# Altium PCB layout.PcbDoc (part 5 of 11)
Units mil, origin at the board's own origin, x right, y up, seen from the top; angles counter-clockwise.
Board outline 3543.31 x 3149.61 mil, 2 copper layers (Top Layer, Bottom Layer); 78 components, 73 nets, 327 pads, 143 vias.
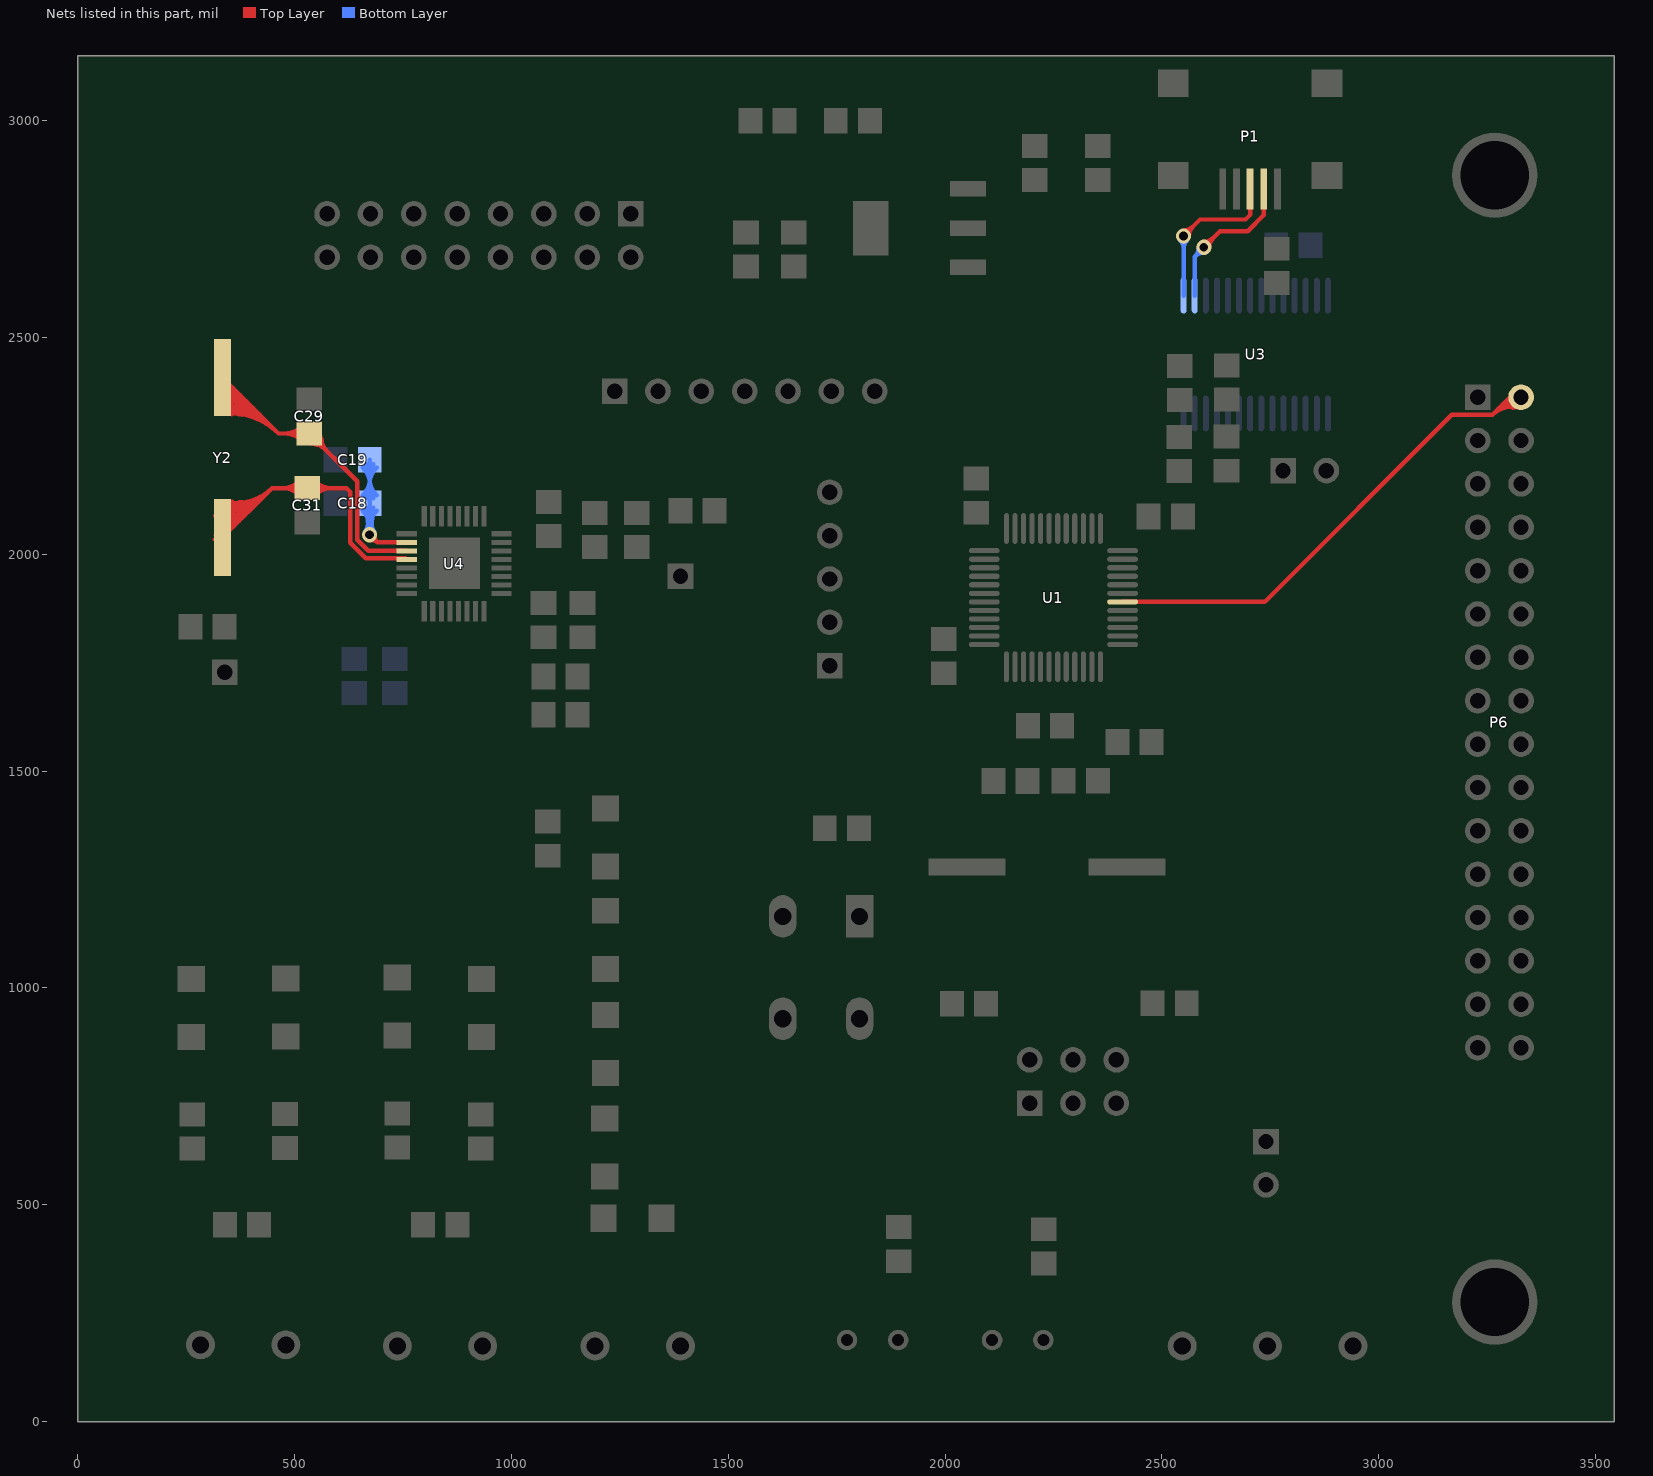
[diagram p5: the nets of this part, all layers, seen from the top]

## Via types
v1: diameter 35, hole 20, Top Layer to Bottom Layer, tented both sides, 113 vias
v2: diameter 35, hole 20, Top Layer to Bottom Layer, 28 vias
v3: diameter 35.43, hole 35.43, Top Layer to Bottom Layer, 2 vias

## Nets (pads, with @x,y where several pads share a name; then routed paths per layer and width w, separated by ;. In a path a pad name is that pad's centre, name@x,y a point inside that pad or via, vN(x,y) a via of type N, cw(c..) or ccw(c..) an arc to the next point about the centre after c; other vN are vias at no path point) (continued)
CLKIN_9153: C31.1 U4.4 Y2.1 | length 10843.8
  Top Layer w10: Y2.1@334,2038.35 448.02,2152.37 ; Y2.1@341.54,2094.65 cw(c347.69,2084.37) 355.99,2093.02 ; Y2.1@348.68,2107.56 ccw(c367.25,2107.95) 354.4,2094.54 ; U4.4@758.72,1988.16 755.95,1990.94 664.13,1990.94 628.5,2026.57 628.5,2143.5 619.63,2152.37 C31.1@529,2152.37 448.02,2152.37 ; Y2.1@316.03,2034.11 ccw(c320.84,2053.66) Y2.1@335.07,2039.43 ; Y2.1@316.03,2034.11 ccw(c320.84,2053.66) Y2.1@335.07,2039.43 ; Y2.1@316.03,2034.11 ccw(c320.84,2053.66) Y2.1@335.07,2039.43 ; Y2.1@316.03,2034.11 ccw(c320.84,2053.66) Y2.1@335.07,2039.43 ; Y2.1@316.03,2034.11 ccw(c320.84,2053.66) Y2.1@335.07,2039.43 ; Y2.1@316.48,2088.98 ccw(c354.79,2128.93) 355.95,2073.59 ; Y2.1@316.48,2088.98 ccw(c331.96,2105.13) Y2.1@332.43,2082.76 ; Y2.1@316.48,2088.98 ccw(c354.79,2128.93) 355.95,2073.59 ; Y2.1@316.48,2088.98 ccw(c331.96,2105.13) Y2.1@332.43,2082.76 ; Y2.1@316.48,2088.98 ccw(c354.79,2128.93) 355.95,2073.59 ; Y2.1@316.48,2088.98 ccw(c331.96,2105.13) Y2.1@332.43,2082.76 ; Y2.1@316.48,2088.98 ccw(c354.79,2128.93) 355.95,2073.59 ; Y2.1@316.48,2088.98 ccw(c331.96,2105.13) Y2.1@332.43,2082.76 ; Y2.1@316.48,2088.98 ccw(c354.79,2128.93) 355.95,2073.59 ; Y2.1@316.48,2088.98 ccw(c331.96,2105.13) Y2.1@332.43,2082.76 ; Y2.1@316.48,2088.98 ccw(c354.79,2128.93) 355.95,2073.59 ; Y2.1@316.48,2088.98 ccw(c331.96,2105.13) Y2.1@332.43,2082.76 ; Y2.1@316.48,2088.98 ccw(c354.79,2128.93) 355.95,2073.59 ; Y2.1@316.48,2088.98 ccw(c331.96,2105.13) Y2.1@332.43,2082.76 ; Y2.1@316.48,2088.98 ccw(c354.79,2128.93) 355.95,2073.59 ; Y2.1@316.48,2088.98 ccw(c331.96,2105.13) Y2.1@332.43,2082.76 ; Y2.1@316.48,2088.98 ccw(c354.79,2128.93) 355.95,2073.59 ; Y2.1@316.48,2088.98 ccw(c331.96,2105.13) Y2.1@332.43,2082.76 ; Y2.1@316.48,2088.98 ccw(c354.79,2128.93) 355.95,2073.59 ; Y2.1@316.48,2088.98 ccw(c331.96,2105.13) Y2.1@332.43,2082.76 ; Y2.1@318.42,2043.82 ccw(c325.79,2073.81) Y2.1@347.62,2051.98 ; Y2.1@318.42,2043.82 ccw(c325.79,2073.81) Y2.1@347.62,2051.98 ; Y2.1@318.42,2043.82 ccw(c325.79,2073.81) Y2.1@347.62,2051.98 ; Y2.1@318.42,2043.82 ccw(c325.79,2073.81) Y2.1@347.62,2051.98 ; Y2.1@318.42,2043.82 ccw(c325.79,2073.81) Y2.1@347.62,2051.98 ; Y2.1@319.77,2101.59 ccw(c360.91,2117.97) Y2.1@350.35,2074.97 ; Y2.1@319.77,2101.59 ccw(c360.91,2117.97) Y2.1@350.35,2074.97 ; Y2.1@319.77,2101.59 ccw(c360.91,2117.97) Y2.1@350.35,2074.97 ; Y2.1@319.77,2101.59 ccw(c360.91,2117.97) Y2.1@350.35,2074.97 ; Y2.1@319.77,2101.59 ccw(c360.91,2117.97) Y2.1@350.35,2074.97 ; Y2.1@319.77,2101.59 ccw(c360.91,2117.97) Y2.1@350.35,2074.97 ; Y2.1@319.77,2101.59 ccw(c360.91,2117.97) Y2.1@350.35,2074.97 ; Y2.1@319.77,2101.59 ccw(c360.91,2117.97) Y2.1@350.35,2074.97 ; Y2.1@319.77,2101.59 ccw(c360.91,2117.97) Y2.1@350.35,2074.97 ; Y2.1@319.77,2101.59 ccw(c360.91,2117.97) Y2.1@350.35,2074.97 ; Y2.1@320.8,2053.53 ccw(c330.73,2093.96) 360.17,2064.52 ; Y2.1@320.8,2053.53 ccw(c330.73,2093.96) 360.17,2064.52 ; Y2.1@320.8,2053.53 ccw(c330.73,2093.96) 360.17,2064.52 ; Y2.1@320.8,2053.53 ccw(c330.73,2093.96) 360.17,2064.52 ; Y2.1@320.8,2053.53 ccw(c330.73,2093.96) 360.17,2064.52 ; Y2.1@323.19,2063.24 ccw(c335.68,2114.11) 372.72,2077.07 ; Y2.1@323.19,2063.24 ccw(c335.68,2114.11) 372.72,2077.07 ; Y2.1@323.19,2063.24 ccw(c335.68,2114.11) 372.72,2077.07 ; Y2.1@323.19,2063.24 ccw(c335.68,2114.11) 372.72,2077.07 ; Y2.1@323.19,2063.24 ccw(c335.68,2114.11) 372.72,2077.07 ; Y2.1@323.4,2096.2 ccw(c355.59,2129.77) 356.57,2083.27 ; Y2.1@323.4,2096.2 ccw(c355.59,2129.77) 356.57,2083.27 ; Y2.1@323.4,2096.2 ccw(c355.59,2129.77) 356.57,2083.27 ; Y2.1@323.4,2096.2 ccw(c355.59,2129.77) 356.57,2083.27 ; Y2.1@323.4,2096.2 ccw(c355.59,2129.77) 356.57,2083.27 ; Y2.1@323.4,2096.2 ccw(c355.59,2129.77) 356.57,2083.27 ; Y2.1@323.4,2096.2 ccw(c355.59,2129.77) 356.57,2083.27 ; Y2.1@323.4,2096.2 ccw(c355.59,2129.77) 356.57,2083.27 ; Y2.1@323.4,2096.2 ccw(c355.59,2129.77) 356.57,2083.27 ; Y2.1@323.4,2096.2 ccw(c355.59,2129.77) 356.57,2083.27 ; Y2.1@325.58,2072.96 ccw(c340.63,2134.26) 385.27,2089.62 ; Y2.1@325.58,2072.96 ccw(c340.63,2134.26) 385.27,2089.62 ; Y2.1@325.58,2072.96 ccw(c340.63,2134.26) 385.27,2089.62 ; Y2.1@325.58,2072.96 ccw(c340.63,2134.26) 385.27,2089.62 ; Y2.1@325.58,2072.96 ccw(c340.63,2134.26) 385.27,2089.62 ; Y2.1@327.96,2082.67 ccw(c345.58,2154.41) 397.82,2102.17 ; Y2.1@327.96,2082.67 ccw(c345.58,2154.41) 397.82,2102.17 ; Y2.1@327.96,2082.67 ccw(c345.58,2154.41) 397.82,2102.17 ; Y2.1@327.96,2082.67 ccw(c345.58,2154.41) 397.82,2102.17 ; Y2.1@327.96,2082.67 ccw(c345.58,2154.41) 397.82,2102.17 ; Y2.1@329.03,2105.38 ccw(c361.14,2117.48) Y2.1@352.95,2084.15 ; Y2.1@329.03,2105.38 ccw(c361.14,2117.48) Y2.1@352.95,2084.15 ; Y2.1@329.03,2105.38 ccw(c361.14,2117.48) Y2.1@352.95,2084.15 ; Y2.1@329.03,2105.38 ccw(c361.14,2117.48) Y2.1@352.95,2084.15 ; Y2.1@329.03,2105.38 ccw(c361.14,2117.48) Y2.1@352.95,2084.15 ; Y2.1@329.03,2105.38 ccw(c361.14,2117.48) Y2.1@352.95,2084.15 ; Y2.1@329.03,2105.38 ccw(c361.14,2117.48) Y2.1@352.95,2084.15 ; Y2.1@329.03,2105.38 ccw(c361.14,2117.48) Y2.1@352.95,2084.15 ; Y2.1@329.03,2105.38 ccw(c361.14,2117.48) Y2.1@352.95,2084.15 ; Y2.1@329.03,2105.38 ccw(c361.14,2117.48) Y2.1@352.95,2084.15 ; Y2.1@330.32,2103.42 ccw(c356.4,2130.61) 357.19,2092.94 ; Y2.1@330.32,2103.42 ccw(c356.4,2130.61) 357.19,2092.94 ; Y2.1@330.32,2103.42 ccw(c356.4,2130.61) 357.19,2092.94 ; Y2.1@330.32,2103.42 ccw(c356.4,2130.61) 357.19,2092.94 ; Y2.1@330.32,2103.42 ccw(c356.4,2130.61) 357.19,2092.94 ; Y2.1@330.32,2103.42 ccw(c356.4,2130.61) 357.19,2092.94 ; Y2.1@330.32,2103.42 ccw(c356.4,2130.61) 357.19,2092.94 ; Y2.1@330.32,2103.42 ccw(c356.4,2130.61) 357.19,2092.94 ; Y2.1@330.32,2103.42 ccw(c356.4,2130.61) 357.19,2092.94 ; Y2.1@330.32,2103.42 ccw(c356.4,2130.61) 357.19,2092.94 ; Y2.1@330.35,2092.38 ccw(c350.53,2174.55) 410.37,2114.72 ; Y2.1@330.35,2092.38 ccw(c350.53,2174.55) 410.37,2114.72 ; Y2.1@330.35,2092.38 ccw(c350.53,2174.55) 410.37,2114.72 ; Y2.1@330.35,2092.38 ccw(c350.53,2174.55) 410.37,2114.72 ; Y2.1@330.35,2092.38 ccw(c350.53,2174.55) 410.37,2114.72 ; Y2.1@330.4,2111.16 cw(c355,2084.46) 356.49,2120.74 ; Y2.1@330.4,2111.16 cw(c355,2084.46) 356.49,2120.74 ; Y2.1@330.4,2111.16 cw(c355,2084.46) 356.49,2120.74 ; Y2.1@330.4,2111.16 cw(c355,2084.46) 356.49,2120.74 ; Y2.1@330.4,2111.16 cw(c355,2084.46) 356.49,2120.74 ; Y2.1@330.4,2111.16 cw(c355,2084.46) 356.49,2120.74 ; Y2.1@330.4,2111.16 cw(c355,2084.46) 356.49,2120.74 ; Y2.1@330.4,2111.16 cw(c355,2084.46) 356.49,2120.74 ; Y2.1@330.4,2111.16 cw(c355,2084.46) 356.49,2120.74 ; Y2.1@330.4,2111.16 cw(c355,2084.46) 356.49,2120.74 ; Y2.1@332.73,2102.09 ccw(c355.48,2194.7) 422.91,2127.27 ; Y2.1@332.73,2102.09 ccw(c355.48,2194.7) 422.91,2127.27 ; Y2.1@332.73,2102.09 ccw(c355.48,2194.7) 422.91,2127.27 ; Y2.1@332.73,2102.09 ccw(c355.48,2194.7) 422.91,2127.27 ; Y2.1@332.73,2102.09 ccw(c355.48,2194.7) 422.91,2127.27 ; Y2.1@335.12,2111.8 ccw(c360.43,2214.85) 435.46,2139.82 ; Y2.1@335.12,2111.8 ccw(c360.43,2214.85) 435.46,2139.82 ; Y2.1@335.12,2111.8 ccw(c360.43,2214.85) 435.46,2139.82 ; Y2.1@335.12,2111.8 ccw(c360.43,2214.85) 435.46,2139.82 ; Y2.1@335.12,2111.8 ccw(c360.43,2214.85) 435.46,2139.82 ; Y2.1@337.17,2103.81 cw(c378.13,2059.35) 380.61,2119.75 ; Y2.1@337.17,2103.81 cw(c378.13,2059.35) 380.61,2119.75 ; Y2.1@337.17,2103.81 cw(c378.13,2059.35) 380.61,2119.75 ; Y2.1@337.17,2103.81 cw(c378.13,2059.35) 380.61,2119.75 ; Y2.1@337.17,2103.81 cw(c378.13,2059.35) 380.61,2119.75 ; Y2.1@337.17,2103.81 cw(c378.13,2059.35) 380.61,2119.75 ; Y2.1@337.17,2103.81 cw(c378.13,2059.35) 380.61,2119.75 ; Y2.1@337.17,2103.81 cw(c378.13,2059.35) 380.61,2119.75 ; Y2.1@337.17,2103.81 cw(c378.13,2059.35) 380.61,2119.75 ; Y2.1@337.17,2103.81 cw(c378.13,2059.35) 380.61,2119.75 ; Y2.1@337.24,2110.63 ccw(c357.2,2131.45) 357.81,2102.62 ; Y2.1@337.24,2110.63 ccw(c357.2,2131.45) 357.81,2102.62 ; Y2.1@337.24,2110.63 ccw(c357.2,2131.45) 357.81,2102.62 ; Y2.1@337.24,2110.63 ccw(c357.2,2131.45) 357.81,2102.62 ; Y2.1@337.24,2110.63 ccw(c357.2,2131.45) 357.81,2102.62 ; Y2.1@337.24,2110.63 ccw(c357.2,2131.45) 357.81,2102.62 ; Y2.1@337.24,2110.63 ccw(c357.2,2131.45) 357.81,2102.62 ; Y2.1@337.24,2110.63 ccw(c357.2,2131.45) 357.81,2102.62 ; Y2.1@337.24,2110.63 ccw(c357.2,2131.45) 357.81,2102.62 ; Y2.1@337.24,2110.63 ccw(c357.2,2131.45) 357.81,2102.62 ; Y2.1@337.28,2103.91 cw(c356.12,2084.73) 356.36,2111.61 ; Y2.1@337.28,2103.91 cw(c356.12,2084.73) 356.36,2111.61 ; Y2.1@337.28,2103.91 cw(c356.12,2084.73) 356.36,2111.61 ; Y2.1@337.28,2103.91 cw(c356.12,2084.73) 356.36,2111.61 ; Y2.1@337.28,2103.91 cw(c356.12,2084.73) 356.36,2111.61 ; Y2.1@337.28,2103.91 cw(c356.12,2084.73) 356.36,2111.61 ; Y2.1@337.28,2103.91 cw(c356.12,2084.73) 356.36,2111.61 ; Y2.1@337.28,2103.91 cw(c356.12,2084.73) 356.36,2111.61 ; Y2.1@337.28,2103.91 cw(c356.12,2084.73) 356.36,2111.61 ; Y2.1@337.28,2103.91 cw(c356.12,2084.73) 356.36,2111.61 ; Y2.1@337.5,2121.51 ccw(c365.38,2235) 448.01,2152.37 ; Y2.1@337.5,2121.51 ccw(c365.38,2235) 448.01,2152.37 ; Y2.1@337.5,2121.51 ccw(c365.38,2235) 448.01,2152.37 ; Y2.1@337.5,2121.51 ccw(c365.38,2235) 448.01,2152.37 ; Y2.1@337.5,2121.51 ccw(c365.38,2235) 448.01,2152.37 ; Y2.1@338.44,2108.75 ccw(c360.65,2116.22) 355.06,2093.46 ; Y2.1@338.44,2108.75 ccw(c360.65,2116.22) 355.06,2093.46 ; Y2.1@338.44,2108.75 ccw(c360.65,2116.22) 355.06,2093.46 ; Y2.1@338.44,2108.75 ccw(c360.65,2116.22) 355.06,2093.46 ; Y2.1@338.44,2108.75 ccw(c360.65,2116.22) 355.06,2093.46 ; Y2.1@338.44,2108.75 ccw(c360.65,2116.22) 355.06,2093.46 ; Y2.1@338.44,2108.75 ccw(c360.65,2116.22) 355.06,2093.46 ; Y2.1@338.44,2108.75 ccw(c360.65,2116.22) 355.06,2093.46 ; Y2.1@338.44,2108.75 ccw(c360.65,2116.22) 355.06,2093.46 ; Y2.1@338.44,2108.75 ccw(c360.65,2116.22) 355.06,2093.46 ; Y2.1@339.71,2093.72 cw(c347.04,2076.33) 356.14,2092.87 ; Y2.1@339.71,2093.72 cw(c347.04,2076.33) 356.14,2092.87 ; Y2.1@339.71,2093.72 cw(c347.04,2076.33) 356.14,2092.87 ; Y2.1@339.71,2093.72 cw(c347.04,2076.33) 356.14,2092.87 ; Y2.1@339.71,2093.72 cw(c347.04,2076.33) 356.14,2092.87 ; Y2.1@343.19,2118.71 ccw(c354.05,2132.26) 362.12,2116.88 ; Y2.1@343.19,2118.71 ccw(c354.05,2132.26) 362.12,2116.88 ; Y2.1@343.19,2118.71 ccw(c354.05,2132.26) 362.12,2116.88 ; Y2.1@343.19,2118.71 ccw(c354.05,2132.26) 362.12,2116.88 ; Y2.1@343.19,2118.71 ccw(c354.05,2132.26) 362.12,2116.88 ; Y2.1@343.19,2118.71 ccw(c354.05,2132.26) 362.12,2116.88 ; Y2.1@343.19,2118.71 ccw(c354.05,2132.26) 362.12,2116.88 ; Y2.1@343.19,2118.71 ccw(c354.05,2132.26) 362.12,2116.88 ; Y2.1@343.19,2118.71 ccw(c354.05,2132.26) 362.12,2116.88 ; Y2.1@343.19,2118.71 ccw(c354.05,2132.26) 362.12,2116.88 ; Y2.1@344.16,2117.85 ccw(c380.84,2156.09) 381.94,2103.12 ; Y2.1@344.16,2117.85 ccw(c380.84,2156.09) 381.94,2103.12 ; Y2.1@344.16,2117.85 ccw(c380.84,2156.09) 381.94,2103.12 ; Y2.1@344.16,2117.85 ccw(c380.84,2156.09) 381.94,2103.12 ; Y2.1@344.16,2117.85 ccw(c380.84,2156.09) 381.94,2103.12 ; Y2.1@344.16,2117.85 ccw(c380.84,2156.09) 381.94,2103.12 ; Y2.1@344.16,2117.85 ccw(c380.84,2156.09) 381.94,2103.12 ; Y2.1@344.16,2117.85 ccw(c380.84,2156.09) 381.94,2103.12 ; Y2.1@344.16,2117.85 ccw(c380.84,2156.09) 381.94,2103.12 ; Y2.1@344.16,2117.85 ccw(c380.84,2156.09) 381.94,2103.12 ; Y2.1@344.29,2096.78 cw(c380.04,2060.38) 380.5,2111.4 ; Y2.1@344.29,2096.78 cw(c380.04,2060.38) 380.5,2111.4 ; Y2.1@344.29,2096.78 cw(c380.04,2060.38) 380.5,2111.4 ; Y2.1@344.29,2096.78 cw(c380.04,2060.38) 380.5,2111.4 ; Y2.1@344.29,2096.78 cw(c380.04,2060.38) 380.5,2111.4 ; Y2.1@344.29,2096.78 cw(c380.04,2060.38) 380.5,2111.4 ; Y2.1@344.29,2096.78 cw(c380.04,2060.38) 380.5,2111.4 ; Y2.1@344.29,2096.78 cw(c380.04,2060.38) 380.5,2111.4 ; Y2.1@344.29,2096.78 cw(c380.04,2060.38) 380.5,2111.4 ; Y2.1@344.29,2096.78 cw(c380.04,2060.38) 380.5,2111.4 ; Y2.1@344.48,2117.54 ccw(c358.66,2131.48) 358.48,2111.59 ; Y2.1@344.48,2117.54 ccw(c358.66,2131.48) 358.48,2111.59 ; Y2.1@344.48,2117.54 ccw(c358.66,2131.48) 358.48,2111.59 ; Y2.1@344.48,2117.54 ccw(c358.66,2131.48) 358.48,2111.59 ; Y2.1@344.48,2117.54 ccw(c358.66,2131.48) 358.48,2111.59 ; Y2.1@344.48,2117.54 ccw(c358.66,2131.48) 358.48,2111.59 ; Y2.1@344.48,2117.54 ccw(c358.66,2131.48) 358.48,2111.59 ; Y2.1@344.48,2117.54 ccw(c358.66,2131.48) 358.48,2111.59 ; Y2.1@344.48,2117.54 ccw(c358.66,2131.48) 358.48,2111.59 ; Y2.1@344.48,2117.54 ccw(c358.66,2131.48) 358.48,2111.59 ; Y2.1@344.6,2097.09 cw(c357.54,2084.68) 357.16,2102.6 ; Y2.1@344.6,2097.09 cw(c357.54,2084.68) 357.16,2102.6 ; Y2.1@344.6,2097.09 cw(c357.54,2084.68) 357.16,2102.6 ; Y2.1@344.6,2097.09 cw(c357.54,2084.68) 357.16,2102.6 ; Y2.1@344.6,2097.09 cw(c357.54,2084.68) 357.16,2102.6 ; Y2.1@344.6,2097.09 cw(c357.54,2084.68) 357.16,2102.6 ; Y2.1@344.6,2097.09 cw(c357.54,2084.68) 357.16,2102.6 ; Y2.1@344.6,2097.09 cw(c357.54,2084.68) 357.16,2102.6 ; Y2.1@344.6,2097.09 cw(c357.54,2084.68) 357.16,2102.6 ; Y2.1@344.6,2097.09 cw(c357.54,2084.68) 357.16,2102.6 ; Y2.1@346.43,2099.44 cw(c353.6,2094.93) 355.62,2103.15 ; Y2.1@346.43,2099.44 cw(c353.6,2094.93) 355.62,2103.15 ; Y2.1@346.43,2099.44 cw(c353.6,2094.93) 355.62,2103.15 ; Y2.1@346.43,2099.44 cw(c353.6,2094.93) 355.62,2103.15 ; Y2.1@346.43,2099.44 cw(c353.6,2094.93) 355.62,2103.15 ; Y2.1@346.43,2099.44 cw(c353.6,2094.93) 355.62,2103.15 ; Y2.1@346.43,2099.44 cw(c353.6,2094.93) 355.62,2103.15 ; Y2.1@346.43,2099.44 cw(c353.6,2094.93) 355.62,2103.15 ; Y2.1@346.43,2099.44 cw(c353.6,2094.93) 355.62,2103.15 ; Y2.1@346.43,2099.44 cw(c353.6,2094.93) 355.62,2103.15 ; Y2.1@348.02,2102.87 cw(c367.11,2096.91) 357.83,2114.63 ; Y2.1@348.02,2102.87 cw(c367.11,2096.91) 357.83,2114.63 ; Y2.1@348.02,2102.87 cw(c367.11,2096.91) 357.83,2114.63 ; Y2.1@348.02,2102.87 cw(c367.11,2096.91) 357.83,2114.63 ; Y2.1@348.02,2102.87 cw(c367.11,2096.91) 357.83,2114.63 ; Y2.1@348.02,2102.87 cw(c367.11,2096.91) 357.83,2114.63 ; Y2.1@348.02,2102.87 cw(c367.11,2096.91) 357.83,2114.63 ; Y2.1@348.02,2102.87 cw(c367.11,2096.91) 357.83,2114.63 ; Y2.1@348.02,2102.87 cw(c367.11,2096.91) 357.83,2114.63 ; Y2.1@348.02,2102.87 cw(c367.11,2096.91) 357.83,2114.63 ; Y2.1@348.31,2110.56 ccw(c357.99,2112.81) 355.62,2103.15 ; Y2.1@348.31,2110.56 ccw(c357.99,2112.81) 355.62,2103.15 ; Y2.1@348.31,2110.56 ccw(c357.99,2112.81) 355.62,2103.15 ; Y2.1@348.31,2110.56 ccw(c357.99,2112.81) 355.62,2103.15 ; Y2.1@348.31,2110.56 ccw(c357.99,2112.81) 355.62,2103.15 ; Y2.1@348.31,2110.56 ccw(c357.99,2112.81) 355.62,2103.15 ; Y2.1@348.31,2110.56 ccw(c357.99,2112.81) 355.62,2103.15 ; Y2.1@348.31,2110.56 ccw(c357.99,2112.81) 355.62,2103.15 ; Y2.1@348.31,2110.56 ccw(c357.99,2112.81) 355.62,2103.15 ; Y2.1@348.31,2110.56 ccw(c357.99,2112.81) 355.62,2103.15 ; Y2.1@348.66,2106.4 ccw(c363.11,2105.56) 356.14,2092.87 ; Y2.1@348.66,2106.4 ccw(c363.11,2105.56) 356.14,2092.87 ; Y2.1@348.66,2106.4 ccw(c363.11,2105.56) 356.14,2092.87 ; Y2.1@348.66,2106.4 ccw(c363.11,2105.56) 356.14,2092.87 ; Y2.1@348.66,2106.4 ccw(c363.11,2105.56) 356.14,2092.87 ; 472.57,2152.37 cw(c472.57,2097.91) C31.1@511.08,2136.42 ; 472.57,2152.37 ccw(c472.57,2206.83) C31.1@511.08,2168.32 ; 472.57,2152.37 cw(c472.57,2097.91) C31.1@511.08,2136.42 ; 472.57,2152.37 ccw(c472.57,2206.83) C31.1@511.08,2168.32 ; 472.57,2152.37 cw(c472.57,2097.91) C31.1@511.08,2136.42 ; 472.57,2152.37 ccw(c472.57,2206.83) C31.1@511.08,2168.32 ; 472.57,2152.37 cw(c472.57,2097.91) C31.1@511.08,2136.42 ; 472.57,2152.37 ccw(c472.57,2206.83) C31.1@511.08,2168.32 ; 472.57,2152.37 cw(c472.57,2097.91) C31.1@511.08,2136.42 ; 472.57,2152.37 ccw(c472.57,2206.83) C31.1@511.08,2168.32 ; 496.71,2152.37 cw(c496.71,2122.05) C31.1@518.15,2143.49 ; 496.71,2152.37 ccw(c496.71,2182.69) C31.1@518.15,2161.25 ; 496.71,2152.37 cw(c496.71,2122.05) C31.1@518.15,2143.49 ; 496.71,2152.37 ccw(c496.71,2182.69) C31.1@518.15,2161.25 ; 496.71,2152.37 cw(c496.71,2122.05) C31.1@518.15,2143.49 ; 496.71,2152.37 ccw(c496.71,2182.69) C31.1@518.15,2161.25 ; 496.71,2152.37 cw(c496.71,2122.05) C31.1@518.15,2143.49 ; 496.71,2152.37 ccw(c496.71,2182.69) C31.1@518.15,2161.25 ; 496.71,2152.37 cw(c496.71,2122.05) C31.1@518.15,2143.49 ; 496.71,2152.37 ccw(c496.71,2182.69) C31.1@518.15,2161.25 ; C31.1@539.85,2143.49 cw(c561.29,2122.05) 561.29,2152.37 ; C31.1@539.85,2143.49 cw(c561.29,2122.05) 561.29,2152.37 ; C31.1@539.85,2143.49 cw(c561.29,2122.05) 561.29,2152.37 ; C31.1@539.85,2143.49 cw(c561.29,2122.05) 561.29,2152.37 ; C31.1@539.85,2143.49 cw(c561.29,2122.05) 561.29,2152.37 ; C31.1@539.85,2161.25 ccw(c561.29,2182.69) 561.29,2152.37 ; C31.1@539.85,2161.25 ccw(c561.29,2182.69) 561.29,2152.37 ; C31.1@539.85,2161.25 ccw(c561.29,2182.69) 561.29,2152.37 ; C31.1@539.85,2161.25 ccw(c561.29,2182.69) 561.29,2152.37 ; C31.1@539.85,2161.25 ccw(c561.29,2182.69) 561.29,2152.37 ; C31.1@546.92,2136.42 cw(c585.43,2097.91) 585.43,2152.37 ; C31.1@546.92,2136.42 cw(c585.43,2097.91) 585.43,2152.37 ; C31.1@546.92,2136.42 cw(c585.43,2097.91) 585.43,2152.37 ; C31.1@546.92,2136.42 cw(c585.43,2097.91) 585.43,2152.37 ; C31.1@546.92,2136.42 cw(c585.43,2097.91) 585.43,2152.37 ; C31.1@546.92,2168.32 ccw(c585.43,2206.83) 585.43,2152.37 ; C31.1@546.92,2168.32 ccw(c585.43,2206.83) 585.43,2152.37 ; C31.1@546.92,2168.32 ccw(c585.43,2206.83) 585.43,2152.37 ; C31.1@546.92,2168.32 ccw(c585.43,2206.83) 585.43,2152.37 ; C31.1@546.92,2168.32 ccw(c585.43,2206.83) 585.43,2152.37 ; 732.11,1990.94 cw(c732.11,1979.26) U4.4@740.37,1987.52 ; 732.11,1990.94 cw(c732.11,1979.26) U4.4@740.37,1987.52 ; 732.11,1990.94 cw(c732.11,1979.26) U4.4@740.37,1987.52 ; 732.11,1990.94 cw(c732.11,1979.26) U4.4@740.37,1987.52 ; 732.11,1990.94 cw(c732.11,1979.26) U4.4@740.37,1987.52
CLKOUT_9153: C29.1 U4.3 Y2.2 | length 10493.8
  Top Layer w10: Y2.2@334,2407.65 463.02,2278.63 ; U4.3@758.72,2007.84 669.85,2007.84 644.5,2033.2 644.5,2168.13 C29.1@534,2278.63 463.02,2278.63 ; Y2.2@321.05,2346.92 cw(c360.08,2322.3) 367.51,2367.84 ; Y2.2@321.05,2346.92 cw(c360.08,2322.3) 367.51,2367.84 ; Y2.2@321.05,2346.92 cw(c360.08,2322.3) 367.51,2367.84 ; Y2.2@321.05,2346.92 cw(c360.08,2322.3) 367.51,2367.84 ; Y2.2@321.05,2346.92 cw(c360.08,2322.3) 367.51,2367.84 ; Y2.2@321.05,2346.92 cw(c360.08,2322.3) 367.51,2367.84 ; Y2.2@321.05,2346.92 cw(c360.08,2322.3) 367.51,2367.84 ; Y2.2@321.05,2346.92 cw(c360.08,2322.3) 367.51,2367.84 ; Y2.2@321.05,2346.92 cw(c360.08,2322.3) 367.51,2367.84 ; Y2.2@321.05,2346.92 cw(c360.08,2322.3) 367.51,2367.84 ; Y2.2@321.57,2398.7 ccw(c358.7,2425.42) Y2.2@351.33,2380.27 ; Y2.2@321.57,2398.7 ccw(c358.7,2425.42) Y2.2@351.33,2380.27 ; Y2.2@321.57,2398.7 ccw(c358.7,2425.42) Y2.2@351.33,2380.27 ; Y2.2@321.57,2398.7 ccw(c358.7,2425.42) Y2.2@351.33,2380.27 ; Y2.2@321.57,2398.7 ccw(c358.7,2425.42) Y2.2@351.33,2380.27 ; Y2.2@321.57,2398.7 ccw(c358.7,2425.42) Y2.2@351.33,2380.27 ; Y2.2@321.57,2398.7 ccw(c358.7,2425.42) Y2.2@351.33,2380.27 ; Y2.2@321.57,2398.7 ccw(c358.7,2425.42) Y2.2@351.33,2380.27 ; Y2.2@321.57,2398.7 ccw(c358.7,2425.42) Y2.2@351.33,2380.27 ; Y2.2@321.57,2398.7 ccw(c358.7,2425.42) Y2.2@351.33,2380.27 ; Y2.2@322.14,2348.44 cw(c361.19,2316.52) 356.15,2366.7 ; Y2.2@322.14,2348.44 cw(c361.19,2316.52) 356.15,2366.7 ; Y2.2@322.14,2348.44 cw(c361.19,2316.52) 356.15,2366.7 ; Y2.2@322.14,2348.44 cw(c361.19,2316.52) 356.15,2366.7 ; Y2.2@322.14,2348.44 cw(c361.19,2316.52) 356.15,2366.7 ; Y2.2@322.14,2348.44 cw(c361.19,2316.52) 356.15,2366.7 ; Y2.2@322.14,2348.44 cw(c361.19,2316.52) 356.15,2366.7 ; Y2.2@322.14,2348.44 cw(c361.19,2316.52) 356.15,2366.7 ; Y2.2@322.14,2348.44 cw(c361.19,2316.52) 356.15,2366.7 ; Y2.2@322.14,2348.44 cw(c361.19,2316.52) 356.15,2366.7 ; Y2.2@327.48,2403.74 cw(c329.48,2383.74) Y2.2@343.7,2397.95 ; Y2.2@327.48,2403.74 cw(c329.48,2383.74) Y2.2@343.7,2397.95 ; Y2.2@327.48,2403.74 cw(c329.48,2383.74) Y2.2@343.7,2397.95 ; Y2.2@327.48,2403.74 cw(c329.48,2383.74) Y2.2@343.7,2397.95 ; Y2.2@327.48,2403.74 cw(c329.48,2383.74) Y2.2@343.7,2397.95 ; Y2.2@328.48,2393.79 cw(c332.2,2356.63) 358.61,2383.04 ; Y2.2@328.48,2393.79 cw(c332.2,2356.63) 358.61,2383.04 ; Y2.2@328.48,2393.79 cw(c332.2,2356.63) 358.61,2383.04 ; Y2.2@328.48,2393.79 cw(c332.2,2356.63) 358.61,2383.04 ; Y2.2@328.48,2393.79 cw(c332.2,2356.63) 358.61,2383.04 ; Y2.2@328.7,2339.1 cw(c356.17,2337.27) Y2.2@346.42,2363.02 ; Y2.2@328.7,2339.1 cw(c356.17,2337.27) Y2.2@346.42,2363.02 ; Y2.2@328.7,2339.1 cw(c356.17,2337.27) Y2.2@346.42,2363.02 ; Y2.2@328.7,2339.1 cw(c356.17,2337.27) Y2.2@346.42,2363.02 ; Y2.2@328.7,2339.1 cw(c356.17,2337.27) Y2.2@346.42,2363.02 ; Y2.2@329.47,2383.84 cw(c334.93,2329.52) 373.52,2368.12 ; Y2.2@329.47,2383.84 cw(c334.93,2329.52) 373.52,2368.12 ; Y2.2@329.47,2383.84 cw(c334.93,2329.52) 373.52,2368.12 ; Y2.2@329.47,2383.84 cw(c334.93,2329.52) 373.52,2368.12 ; Y2.2@329.47,2383.84 cw(c334.93,2329.52) 373.52,2368.12 ; Y2.2@330.05,2335.19 ccw(c357.35,2359.74) 355.4,2323.08 ; Y2.2@330.05,2335.19 ccw(c357.35,2359.74) 355.4,2323.08 ; Y2.2@330.05,2335.19 ccw(c357.35,2359.74) 355.4,2323.08 ; Y2.2@330.05,2335.19 ccw(c357.35,2359.74) 355.4,2323.08 ; Y2.2@330.05,2335.19 ccw(c357.35,2359.74) 355.4,2323.08 ; Y2.2@330.05,2335.19 ccw(c357.35,2359.74) 355.4,2323.08 ; Y2.2@330.05,2335.19 ccw(c357.35,2359.74) 355.4,2323.08 ; Y2.2@330.05,2335.19 ccw(c357.35,2359.74) 355.4,2323.08 ; Y2.2@330.05,2335.19 ccw(c357.35,2359.74) 355.4,2323.08 ; Y2.2@330.05,2335.19 ccw(c357.35,2359.74) 355.4,2323.08 ; Y2.2@330.47,2373.89 cw(c337.65,2302.42) 388.44,2353.21 ; Y2.2@330.47,2373.89 cw(c337.65,2302.42) 388.44,2353.21 ; Y2.2@330.47,2373.89 cw(c337.65,2302.42) 388.44,2353.21 ; Y2.2@330.47,2373.89 cw(c337.65,2302.42) 388.44,2353.21 ; Y2.2@330.47,2373.89 cw(c337.65,2302.42) 388.44,2353.21 ; Y2.2@331.47,2363.94 cw(c340.37,2275.31) 403.35,2338.29 ; Y2.2@331.47,2363.94 cw(c340.37,2275.31) 403.35,2338.29 ; Y2.2@331.47,2363.94 cw(c340.37,2275.31) 403.35,2338.29 ; Y2.2@331.47,2363.94 cw(c340.37,2275.31) 403.35,2338.29 ; Y2.2@331.47,2363.94 cw(c340.37,2275.31) 403.35,2338.29 ; Y2.2@332.47,2353.99 cw(c343.09,2248.2) 418.27,2323.38 ; Y2.2@332.47,2353.99 cw(c343.09,2248.2) 418.27,2323.38 ; Y2.2@332.47,2353.99 cw(c343.09,2248.2) 418.27,2323.38 ; Y2.2@332.47,2353.99 cw(c343.09,2248.2) 418.27,2323.38 ; Y2.2@332.47,2353.99 cw(c343.09,2248.2) 418.27,2323.38 ; Y2.2@333.47,2344.04 cw(c345.81,2221.09) 433.18,2308.46 ; Y2.2@333.47,2344.04 cw(c345.81,2221.09) 433.18,2308.46 ; Y2.2@333.47,2344.04 cw(c345.81,2221.09) 433.18,2308.46 ; Y2.2@333.47,2344.04 cw(c345.81,2221.09) 433.18,2308.46 ; Y2.2@333.47,2344.04 cw(c345.81,2221.09) 433.18,2308.46 ; Y2.2@334.47,2334.09 cw(c348.53,2193.98) 448.1,2293.55 ; Y2.2@334.47,2334.09 cw(c348.53,2193.98) 448.1,2293.55 ; Y2.2@334.47,2334.09 cw(c348.53,2193.98) 448.1,2293.55 ; Y2.2@334.47,2334.09 cw(c348.53,2193.98) 448.1,2293.55 ; Y2.2@334.47,2334.09 cw(c348.53,2193.98) 448.1,2293.55 ; Y2.2@335.47,2324.14 cw(c351.25,2166.88) 463.01,2278.63 ; Y2.2@335.47,2324.14 cw(c351.25,2166.88) 463.01,2278.63 ; Y2.2@335.47,2324.14 cw(c351.25,2166.88) 463.01,2278.63 ; Y2.2@335.47,2324.14 cw(c351.25,2166.88) 463.01,2278.63 ; Y2.2@335.47,2324.14 cw(c351.25,2166.88) 463.01,2278.63 ; Y2.2@337.48,2341.88 ccw(c382.74,2382.57) 379.51,2321.79 ; Y2.2@337.48,2341.88 ccw(c382.74,2382.57) 379.51,2321.79 ; Y2.2@337.48,2341.88 ccw(c382.74,2382.57) 379.51,2321.79 ; Y2.2@337.48,2341.88 ccw(c382.74,2382.57) 379.51,2321.79 ; Y2.2@337.48,2341.88 ccw(c382.74,2382.57) 379.51,2321.79 ; Y2.2@337.48,2341.88 ccw(c382.74,2382.57) 379.51,2321.79 ; Y2.2@337.48,2341.88 ccw(c382.74,2382.57) 379.51,2321.79 ; Y2.2@337.48,2341.88 ccw(c382.74,2382.57) 379.51,2321.79 ; Y2.2@337.48,2341.88 ccw(c382.74,2382.57) 379.51,2321.79 ; Y2.2@337.48,2341.88 ccw(c382.74,2382.57) 379.51,2321.79 ; Y2.2@337.55,2341.8 ccw(c358.08,2359.43) 356.03,2332.45 ; Y2.2@337.55,2341.8 ccw(c358.08,2359.43) 356.03,2332.45 ; Y2.2@337.55,2341.8 ccw(c358.08,2359.43) 356.03,2332.45 ; Y2.2@337.55,2341.8 ccw(c358.08,2359.43) 356.03,2332.45 ; Y2.2@337.55,2341.8 ccw(c358.08,2359.43) 356.03,2332.45 ; Y2.2@337.55,2341.8 ccw(c358.08,2359.43) 356.03,2332.45 ; Y2.2@337.55,2341.8 ccw(c358.08,2359.43) 356.03,2332.45 ; Y2.2@337.55,2341.8 ccw(c358.08,2359.43) 356.03,2332.45 ; Y2.2@337.55,2341.8 ccw(c358.08,2359.43) 356.03,2332.45 ; Y2.2@337.55,2341.8 ccw(c358.08,2359.43) 356.03,2332.45 ; Y2.2@341.57,2326.16 cw(c351.59,2309.48) 362.21,2325.8 ; Y2.2@341.57,2326.16 cw(c351.59,2309.48) 362.21,2325.8 ; Y2.2@341.57,2326.16 cw(c351.59,2309.48) 362.21,2325.8 ; Y2.2@341.57,2326.16 cw(c351.59,2309.48) 362.21,2325.8 ; Y2.2@341.57,2326.16 cw(c351.59,2309.48) 362.21,2325.8 ; Y2.2@341.57,2326.16 cw(c351.59,2309.48) 362.21,2325.8 ; Y2.2@341.57,2326.16 cw(c351.59,2309.48) 362.21,2325.8 ; Y2.2@341.57,2326.16 cw(c351.59,2309.48) 362.21,2325.8 ; Y2.2@341.57,2326.16 cw(c351.59,2309.48) 362.21,2325.8 ; Y2.2@341.57,2326.16 cw(c351.59,2309.48) 362.21,2325.8 ; Y2.2@343.57,2327.61 cw(c356.41,2312.66) 357.9,2332.31 ; Y2.2@343.57,2327.61 cw(c356.41,2312.66) 357.9,2332.31 ; Y2.2@343.57,2327.61 cw(c356.41,2312.66) 357.9,2332.31 ; Y2.2@343.57,2327.61 cw(c356.41,2312.66) 357.9,2332.31 ; Y2.2@343.57,2327.61 cw(c356.41,2312.66) 357.9,2332.31 ; Y2.2@343.57,2327.61 cw(c356.41,2312.66) 357.9,2332.31 ; Y2.2@343.57,2327.61 cw(c356.41,2312.66) 357.9,2332.31 ; Y2.2@343.57,2327.61 cw(c356.41,2312.66) 357.9,2332.31 ; Y2.2@343.57,2327.61 cw(c356.41,2312.66) 357.9,2332.31 ; Y2.2@343.57,2327.61 cw(c356.41,2312.66) 357.9,2332.31 ; Y2.2@345.14,2348.32 ccw(c383.98,2381.68) 380.11,2330.63 ; Y2.2@345.14,2348.32 ccw(c383.98,2381.68) 380.11,2330.63 ; Y2.2@345.14,2348.32 ccw(c383.98,2381.68) 380.11,2330.63 ; Y2.2@345.14,2348.32 ccw(c383.98,2381.68) 380.11,2330.63 ; Y2.2@345.14,2348.32 ccw(c383.98,2381.68) 380.11,2330.63 ; Y2.2@345.14,2348.32 ccw(c383.98,2381.68) 380.11,2330.63 ; Y2.2@345.14,2348.32 ccw(c383.98,2381.68) 380.11,2330.63 ; Y2.2@345.14,2348.32 ccw(c383.98,2381.68) 380.11,2330.63 ; Y2.2@345.14,2348.32 ccw(c383.98,2381.68) 380.11,2330.63 ; Y2.2@345.14,2348.32 ccw(c383.98,2381.68) 380.11,2330.63 ; Y2.2@345.41,2347.99 ccw(c359.15,2359.12) 357.31,2341.53 ; Y2.2@345.41,2347.99 ccw(c359.15,2359.12) 357.31,2341.53 ; Y2.2@345.41,2347.99 ccw(c359.15,2359.12) 357.31,2341.53 ; Y2.2@345.41,2347.99 ccw(c359.15,2359.12) 357.31,2341.53 ; Y2.2@345.41,2347.99 ccw(c359.15,2359.12) 357.31,2341.53 ; Y2.2@345.41,2347.99 ccw(c359.15,2359.12) 357.31,2341.53 ; Y2.2@345.41,2347.99 ccw(c359.15,2359.12) 357.31,2341.53 ; Y2.2@345.41,2347.99 ccw(c359.15,2359.12) 357.31,2341.53 ; Y2.2@345.41,2347.99 ccw(c359.15,2359.12) 357.31,2341.53 ; Y2.2@345.41,2347.99 ccw(c359.15,2359.12) 357.31,2341.53 ; Y2.2@347.39,2344.78 ccw(c353.84,2347.69) 354.94,2340.7 ; Y2.2@347.39,2344.78 ccw(c353.84,2347.69) 354.94,2340.7 ; Y2.2@347.39,2344.78 ccw(c353.84,2347.69) 354.94,2340.7 ; Y2.2@347.39,2344.78 ccw(c353.84,2347.69) 354.94,2340.7 ; Y2.2@347.39,2344.78 ccw(c353.84,2347.69) 354.94,2340.7 ; Y2.2@347.39,2344.78 ccw(c353.84,2347.69) 354.94,2340.7 ; Y2.2@347.39,2344.78 ccw(c353.84,2347.69) 354.94,2340.7 ; Y2.2@347.39,2344.78 ccw(c353.84,2347.69) 354.94,2340.7 ; Y2.2@347.39,2344.78 ccw(c353.84,2347.69) 354.94,2340.7 ; Y2.2@347.39,2344.78 ccw(c353.84,2347.69) 354.94,2340.7 ; Y2.2@347.96,2334.18 cw(c357.94,2330.91) 359.03,2341.35 ; Y2.2@347.96,2334.18 cw(c357.94,2330.91) 359.03,2341.35 ; Y2.2@347.96,2334.18 cw(c357.94,2330.91) 359.03,2341.35 ; Y2.2@347.96,2334.18 cw(c357.94,2330.91) 359.03,2341.35 ; Y2.2@347.96,2334.18 cw(c357.94,2330.91) 359.03,2341.35 ; Y2.2@347.96,2334.18 cw(c357.94,2330.91) 359.03,2341.35 ; Y2.2@347.96,2334.18 cw(c357.94,2330.91) 359.03,2341.35 ; Y2.2@347.96,2334.18 cw(c357.94,2330.91) 359.03,2341.35 ; Y2.2@347.96,2334.18 cw(c357.94,2330.91) 359.03,2341.35 ; Y2.2@347.96,2334.18 cw(c357.94,2330.91) 359.03,2341.35 ; Y2.2@348.11,2334.67 cw(c356.27,2332.31) 354.94,2340.7 ; Y2.2@348.11,2334.67 cw(c356.27,2332.31) 354.94,2340.7 ; Y2.2@348.11,2334.67 cw(c356.27,2332.31) 354.94,2340.7 ; Y2.2@348.11,2334.67 cw(c356.27,2332.31) 354.94,2340.7 ; Y2.2@348.11,2334.67 cw(c356.27,2332.31) 354.94,2340.7 ; Y2.2@348.11,2334.67 cw(c356.27,2332.31) 354.94,2340.7 ; Y2.2@348.11,2334.67 cw(c356.27,2332.31) 354.94,2340.7 ; Y2.2@348.11,2334.67 cw(c356.27,2332.31) 354.94,2340.7 ; Y2.2@348.11,2334.67 cw(c356.27,2332.31) 354.94,2340.7 ; Y2.2@348.11,2334.67 cw(c356.27,2332.31) 354.94,2340.7 ; Y2.2@348.37,2341.79 ccw(c367.93,2345.93) 357.03,2329.17 ; Y2.2@348.37,2341.79 ccw(c367.93,2345.93) 357.03,2329.17 ; Y2.2@348.37,2341.79 ccw(c367.93,2345.93) 357.03,2329.17 ; Y2.2@348.37,2341.79 ccw(c367.93,2345.93) 357.03,2329.17 ; Y2.2@348.37,2341.79 ccw(c367.93,2345.93) 357.03,2329.17 ; Y2.2@348.37,2341.79 ccw(c367.93,2345.93) 357.03,2329.17 ; Y2.2@348.37,2341.79 ccw(c367.93,2345.93) 357.03,2329.17 ; Y2.2@348.37,2341.79 ccw(c367.93,2345.93) 357.03,2329.17 ; Y2.2@348.37,2341.79 ccw(c367.93,2345.93) 357.03,2329.17 ; Y2.2@348.37,2341.79 ccw(c367.93,2345.93) 357.03,2329.17 ; 477.57,2278.63 cw(c477.57,2224.17) C29.1@516.08,2262.68 ; 477.57,2278.63 ccw(c477.57,2333.09) C29.1@516.08,2294.58 ; 477.57,2278.63 cw(c477.57,2224.17) C29.1@516.08,2262.68 ; 477.57,2278.63 ccw(c477.57,2333.09) C29.1@516.08,2294.58 ; 477.57,2278.63 cw(c477.57,2224.17) C29.1@516.08,2262.68 ; 477.57,2278.63 ccw(c477.57,2333.09) C29.1@516.08,2294.58 ; 477.57,2278.63 cw(c477.57,2224.17) C29.1@516.08,2262.68 ; 477.57,2278.63 ccw(c477.57,2333.09) C29.1@516.08,2294.58 ; 477.57,2278.63 cw(c477.57,2224.17) C29.1@516.08,2262.68 ; 477.57,2278.63 ccw(c477.57,2333.09) C29.1@516.08,2294.58 ; 501.71,2278.63 cw(c501.71,2248.31) C29.1@523.15,2269.75 ; 501.71,2278.63 ccw(c501.71,2308.95) C29.1@523.15,2287.51 ; 501.71,2278.63 cw(c501.71,2248.31) C29.1@523.15,2269.75 ; 501.71,2278.63 ccw(c501.71,2308.95) C29.1@523.15,2287.51 ; 501.71,2278.63 cw(c501.71,2248.31) C29.1@523.15,2269.75 ; 501.71,2278.63 ccw(c501.71,2308.95) C29.1@523.15,2287.51 ; 501.71,2278.63 cw(c501.71,2248.31) C29.1@523.15,2269.75 ; 501.71,2278.63 ccw(c501.71,2308.95) C29.1@523.15,2287.51 ; 501.71,2278.63 cw(c501.71,2248.31) C29.1@523.15,2269.75 ; 501.71,2278.63 ccw(c501.71,2308.95) C29.1@523.15,2287.51 ; C29.1@528.64,2277.37 ccw(c560.31,2282.82) C29.1@551.99,2251.78 ; C29.1@528.64,2277.37 ccw(c560.31,2282.82) C29.1@551.99,2251.78 ; C29.1@528.64,2277.37 ccw(c560.31,2282.82) C29.1@551.99,2251.78 ; C29.1@528.64,2277.37 ccw(c560.31,2282.82) C29.1@551.99,2251.78 ; C29.1@528.64,2277.37 ccw(c560.31,2282.82) C29.1@551.99,2251.78 ; C29.1@528.64,2277.37 ccw(c560.31,2282.82) C29.1@551.99,2251.78 ; C29.1@528.64,2277.37 ccw(c560.31,2282.82) C29.1@551.99,2251.78 ; C29.1@528.64,2277.37 ccw(c560.31,2282.82) C29.1@551.99,2251.78 ; C29.1@528.64,2277.37 ccw(c560.31,2282.82) C29.1@551.99,2251.78 ; C29.1@528.64,2277.37 ccw(c560.31,2282.82) C29.1@551.99,2251.78 ; C29.1@535.38,2276.14 cw(c525.33,2233.59) 567.56,2244.9 ; C29.1@535.38,2276.14 cw(c525.33,2233.59) 567.56,2244.9 ; C29.1@535.38,2276.14 cw(c525.33,2233.59) 567.56,2244.9 ; C29.1@535.38,2276.14 cw(c525.33,2233.59) 567.56,2244.9 ; C29.1@535.38,2276.14 cw(c525.33,2233.59) 567.56,2244.9 ; C29.1@535.38,2276.14 cw(c525.33,2233.59) 567.56,2244.9 ; C29.1@535.38,2276.14 cw(c525.33,2233.59) 567.56,2244.9 ; C29.1@535.38,2276.14 cw(c525.33,2233.59) 567.56,2244.9 ; C29.1@535.38,2276.14 cw(c525.33,2233.59) 567.56,2244.9 ; C29.1@535.38,2276.14 cw(c525.33,2233.59) 567.56,2244.9 ; C29.1@535.97,2256.07 cw(c535.97,2206.36) 571.12,2241.51 ; C29.1@535.97,2256.07 cw(c535.97,2206.36) 571.12,2241.51 ; C29.1@535.97,2256.07 cw(c535.97,2206.36) 571.12,2241.51 ; C29.1@535.97,2256.07 cw(c535.97,2206.36) 571.12,2241.51 ; C29.1@535.97,2256.07 cw(c535.97,2206.36) 571.12,2241.51 ; C29.1@537.68,2285.87 cw(c529.7,2252.09) C29.1@563.23,2261.07 ; C29.1@537.68,2285.87 cw(c529.7,2252.09) C29.1@563.23,2261.07 ; C29.1@537.68,2285.87 cw(c529.7,2252.09) C29.1@563.23,2261.07 ; C29.1@537.68,2285.87 cw(c529.7,2252.09) C29.1@563.23,2261.07 ; C29.1@537.68,2285.87 cw(c529.7,2252.09) C29.1@563.23,2261.07 ; C29.1@537.68,2285.87 cw(c529.7,2252.09) C29.1@563.23,2261.07 ; C29.1@537.68,2285.87 cw(c529.7,2252.09) C29.1@563.23,2261.07 ; C29.1@537.68,2285.87 cw(c529.7,2252.09) C29.1@563.23,2261.07 ; C29.1@537.68,2285.87 cw(c529.7,2252.09) C29.1@563.23,2261.07 ; C29.1@537.68,2285.87 cw(c529.7,2252.09) C29.1@563.23,2261.07 ; C29.1@548.53,2278.63 ccw(c583.6,2278.63) C29.1@558.8,2253.83 ; C29.1@548.53,2278.63 ccw(c583.6,2278.63) C29.1@558.8,2253.83 ; C29.1@548.53,2278.63 ccw(c583.6,2278.63) C29.1@558.8,2253.83 ; C29.1@548.53,2278.63 ccw(c583.6,2278.63) C29.1@558.8,2253.83 ; C29.1@548.53,2278.63 ccw(c583.6,2278.63) C29.1@558.8,2253.83 ; C29.1@558.53,2278.63 ccw(c617.74,2278.63) 575.87,2236.76 ; C29.1@558.53,2278.63 ccw(c617.74,2278.63) 575.87,2236.76 ; C29.1@558.53,2278.63 ccw(c617.74,2278.63) 575.87,2236.76 ; C29.1@558.53,2278.63 ccw(c617.74,2278.63) 575.87,2236.76 ; C29.1@558.53,2278.63 ccw(c617.74,2278.63) 575.87,2236.76
D+: P1.3 U3.15 | length 1373.1
  Top Layer w10: v2(2550,2734) 2588,2772 2693,2772 2703.56,2782.56 P1.3@2703.56,2841.87 ; v2@2549.5,2736.45 ccw(c2544.71,2759.83) 2567.77,2753.66 ; v2@2549.5,2736.45 ccw(c2544.71,2759.83) 2567.77,2753.66 ; v2@2549.5,2736.45 ccw(c2544.71,2759.83) 2567.77,2753.66 ; v2@2549.5,2736.45 ccw(c2544.71,2759.83) 2567.77,2753.66 ; v2@2549.5,2736.45 ccw(c2544.71,2759.83) 2567.77,2753.66 ; v2@2549.5,2736.45 ccw(c2544.71,2759.83) 2567.77,2753.66 ; v2@2549.5,2736.45 ccw(c2544.71,2759.83) 2567.77,2753.66 ; v2@2549.5,2736.45 ccw(c2544.71,2759.83) 2567.77,2753.66 ; v2@2549.5,2736.45 ccw(c2544.71,2759.83) 2567.77,2753.66 ; v2@2549.5,2736.45 ccw(c2544.71,2759.83) 2567.77,2753.66 ; v2@2550,2746.5 ccw(c2550,2776.68) 2571.34,2755.34 ; v2@2550,2746.5 ccw(c2550,2776.68) 2571.34,2755.34 ; v2@2550,2746.5 ccw(c2550,2776.68) 2571.34,2755.34 ; v2@2550,2746.5 ccw(c2550,2776.68) 2571.34,2755.34 ; v2@2550,2746.5 ccw(c2550,2776.68) 2571.34,2755.34 ; v2@2552.45,2733.5 cw(c2575.83,2728.71) 2569.66,2751.77 ; v2@2552.45,2733.5 cw(c2575.83,2728.71) 2569.66,2751.77 ; v2@2552.45,2733.5 cw(c2575.83,2728.71) 2569.66,2751.77 ; v2@2552.45,2733.5 cw(c2575.83,2728.71) 2569.66,2751.77 ; v2@2552.45,2733.5 cw(c2575.83,2728.71) 2569.66,2751.77 ; v2@2552.45,2733.5 cw(c2575.83,2728.71) 2569.66,2751.77 ; v2@2552.45,2733.5 cw(c2575.83,2728.71) 2569.66,2751.77 ; v2@2552.45,2733.5 cw(c2575.83,2728.71) 2569.66,2751.77 ; v2@2552.45,2733.5 cw(c2575.83,2728.71) 2569.66,2751.77 ; v2@2552.45,2733.5 cw(c2575.83,2728.71) 2569.66,2751.77 ; v2@2562.5,2734 cw(c2592.68,2734) 2571.34,2755.34 ; v2@2562.5,2734 cw(c2592.68,2734) 2571.34,2755.34 ; v2@2562.5,2734 cw(c2592.68,2734) 2571.34,2755.34 ; v2@2562.5,2734 cw(c2592.68,2734) 2571.34,2755.34 ; v2@2562.5,2734 cw(c2592.68,2734) 2571.34,2755.34
  Bottom Layer w10: v2(2550,2734) 2550.2,2733.8 U3.15@2550.2,2596.46 ; v2@2541.16,2725.16 cw(c2519.34,2703.34) 2550.2,2703.34 ; v2@2541.16,2725.16 cw(c2519.34,2703.34) 2550.2,2703.34 ; v2@2541.16,2725.16 cw(c2519.34,2703.34) 2550.2,2703.34 ; v2@2541.16,2725.16 cw(c2519.34,2703.34) 2550.2,2703.34 ; v2@2541.16,2725.16 cw(c2519.34,2703.34) 2550.2,2703.34 ; 2550.2,2704.3 cw(c2579.7,2704.3) v2@2558.84,2725.16 ; 2550.2,2704.3 cw(c2579.7,2704.3) v2@2558.84,2725.16 ; 2550.2,2704.3 cw(c2579.7,2704.3) v2@2558.84,2725.16 ; 2550.2,2704.3 cw(c2579.7,2704.3) v2@2558.84,2725.16 ; 2550.2,2704.3 cw(c2579.7,2704.3) v2@2558.84,2725.16
D-: P1.2 U3.16 | length 1344.5
  Top Layer w10: v2(2597,2708) 2634,2745 2698,2745 2735.06,2782.06 P1.2@2735.06,2841.87 ; v2@2596.5,2710.45 ccw(c2591.71,2733.83) 2614.77,2727.66 ; v2@2596.5,2710.45 ccw(c2591.71,2733.83) 2614.77,2727.66 ; v2@2596.5,2710.45 ccw(c2591.71,2733.83) 2614.77,2727.66 ; v2@2596.5,2710.45 ccw(c2591.71,2733.83) 2614.77,2727.66 ; v2@2596.5,2710.45 ccw(c2591.71,2733.83) 2614.77,2727.66 ; v2@2596.5,2710.45 ccw(c2591.71,2733.83) 2614.77,2727.66 ; v2@2596.5,2710.45 ccw(c2591.71,2733.83) 2614.77,2727.66 ; v2@2596.5,2710.45 ccw(c2591.71,2733.83) 2614.77,2727.66 ; v2@2596.5,2710.45 ccw(c2591.71,2733.83) 2614.77,2727.66 ; v2@2596.5,2710.45 ccw(c2591.71,2733.83) 2614.77,2727.66 ; v2@2597,2720.5 ccw(c2597,2750.68) 2618.34,2729.34 ; v2@2597,2720.5 ccw(c2597,2750.68) 2618.34,2729.34 ; v2@2597,2720.5 ccw(c2597,2750.68) 2618.34,2729.34 ; v2@2597,2720.5 ccw(c2597,2750.68) 2618.34,2729.34 ; v2@2597,2720.5 ccw(c2597,2750.68) 2618.34,2729.34 ; v2@2599.45,2707.5 cw(c2622.83,2702.71) 2616.66,2725.77 ; v2@2599.45,2707.5 cw(c2622.83,2702.71) 2616.66,2725.77 ; v2@2599.45,2707.5 cw(c2622.83,2702.71) 2616.66,2725.77 ; v2@2599.45,2707.5 cw(c2622.83,2702.71) 2616.66,2725.77 ; v2@2599.45,2707.5 cw(c2622.83,2702.71) 2616.66,2725.77 ; v2@2599.45,2707.5 cw(c2622.83,2702.71) 2616.66,2725.77 ; v2@2599.45,2707.5 cw(c2622.83,2702.71) 2616.66,2725.77 ; v2@2599.45,2707.5 cw(c2622.83,2702.71) 2616.66,2725.77 ; v2@2599.45,2707.5 cw(c2622.83,2702.71) 2616.66,2725.77 ; v2@2599.45,2707.5 cw(c2622.83,2702.71) 2616.66,2725.77 ; v2@2609.5,2708 cw(c2639.68,2708) 2618.34,2729.34 ; v2@2609.5,2708 cw(c2639.68,2708) 2618.34,2729.34 ; v2@2609.5,2708 cw(c2639.68,2708) 2618.34,2729.34 ; v2@2609.5,2708 cw(c2639.68,2708) 2618.34,2729.34 ; v2@2609.5,2708 cw(c2639.68,2708) 2618.34,2729.34
  Bottom Layer w10: U3.16@2575.79,2596.46 2575.79,2685.79 ; v2(2597,2708) 2597,2707 2575.79,2685.79 ; 2575.79,2685.79 ccw(c2554.72,2706.86) v2@2584.5,2707.66 ; 2575.79,2685.79 ccw(c2554.72,2706.86) v2@2584.5,2707.66 ; 2575.79,2685.79 ccw(c2554.72,2706.86) v2@2584.5,2707.66 ; 2575.79,2685.79 ccw(c2554.72,2706.86) v2@2584.5,2707.66 ; 2575.79,2685.79 ccw(c2554.72,2706.86) v2@2584.5,2707.66 ; 2577.37,2687.37 cw(c2597,2667.74) v2@2597,2695.5 ; 2577.37,2687.37 cw(c2597,2667.74) v2@2597,2695.5 ; 2577.37,2687.37 cw(c2597,2667.74) v2@2597,2695.5 ; 2577.37,2687.37 cw(c2597,2667.74) v2@2597,2695.5 ; 2577.37,2687.37 cw(c2597,2667.74) v2@2597,2695.5
DVDDOUT: C18.1 C19.1 U4.2 | length 3966.3
  Top Layer w10: v2(673,2045) 690.47,2027.53 ; U4.2@758.72,2027.53 690.47,2027.53 ; v2@674.88,2032.64 cw(c677.62,2014.68) 690.47,2027.53 ; v2@674.88,2032.64 cw(c677.62,2014.68) 690.47,2027.53 ; v2@674.88,2032.64 cw(c677.62,2014.68) 690.47,2027.53 ; v2@674.88,2032.64 cw(c677.62,2014.68) 690.47,2027.53 ; v2@674.88,2032.64 cw(c677.62,2014.68) 690.47,2027.53 ; v2@685.36,2043.12 ccw(c703.32,2040.38) 690.47,2027.53 ; v2@685.36,2043.12 ccw(c703.32,2040.38) 690.47,2027.53 ; v2@685.36,2043.12 ccw(c703.32,2040.38) 690.47,2027.53 ; v2@685.36,2043.12 ccw(c703.32,2040.38) 690.47,2027.53 ; v2@685.36,2043.12 ccw(c703.32,2040.38) 690.47,2027.53
  Bottom Layer w10: v2(673,2045) 673.37,2045.37 C18.1@673.37,2118 C19.1@673.37,2218 ; C18.1@657.42,2100.08 cw(c618.91,2061.57) v2@673.37,2061.57 ; C18.1@657.42,2100.08 cw(c618.91,2061.57) v2@673.37,2061.57 ; C18.1@657.42,2100.08 cw(c618.91,2061.57) v2@673.37,2061.57 ; C18.1@657.42,2100.08 cw(c618.91,2061.57) v2@673.37,2061.57 ; C18.1@657.42,2100.08 cw(c618.91,2061.57) v2@673.37,2061.57 ; C18.1@657.42,2135.92 ccw(c618.91,2174.43) 673.37,2174.43 ; C18.1@657.42,2135.92 ccw(c618.91,2174.43) 673.37,2174.43 ; C18.1@657.42,2135.92 ccw(c618.91,2174.43) 673.37,2174.43 ; C18.1@657.42,2135.92 ccw(c618.91,2174.43) 673.37,2174.43 ; C18.1@657.42,2135.92 ccw(c618.91,2174.43) 673.37,2174.43 ; C19.1@657.42,2200.08 cw(c618.91,2161.57) 673.37,2161.57 ; C19.1@657.42,2200.08 cw(c618.91,2161.57) 673.37,2161.57 ; C19.1@657.42,2200.08 cw(c618.91,2161.57) 673.37,2161.57 ; C19.1@657.42,2200.08 cw(c618.91,2161.57) 673.37,2161.57 ; C19.1@657.42,2200.08 cw(c618.91,2161.57) 673.37,2161.57 ; v2@662.87,2052.32 ccw(c635.34,2072.23) 668.16,2081.03 ; v2@662.87,2052.32 ccw(c635.34,2072.23) 668.16,2081.03 ; v2@662.87,2052.32 ccw(c635.34,2072.23) 668.16,2081.03 ; v2@662.87,2052.32 ccw(c635.34,2072.23) 668.16,2081.03 ; v2@662.87,2052.32 ccw(c635.34,2072.23) 668.16,2081.03 ; v2@662.87,2052.32 ccw(c635.34,2072.23) 668.16,2081.03 ; v2@662.87,2052.32 ccw(c635.34,2072.23) 668.16,2081.03 ; v2@662.87,2052.32 ccw(c635.34,2072.23) 668.16,2081.03 ; v2@662.87,2052.32 ccw(c635.34,2072.23) 668.16,2081.03 ; v2@662.87,2052.32 ccw(c635.34,2072.23) 668.16,2081.03 ; v2@662.87,2052.32 ccw(c635.34,2072.23) 668.16,2081.03 ; v2@662.87,2052.32 ccw(c635.34,2072.23) 668.16,2081.03 ; v2@662.87,2052.32 ccw(c635.34,2072.23) 668.16,2081.03 ; v2@662.87,2052.32 ccw(c635.34,2072.23) 668.16,2081.03 ; v2@662.87,2052.32 ccw(c635.34,2072.23) 668.16,2081.03 ; v2@664.16,2053.84 ccw(c641.93,2076.07) 673.37,2076.07 ; v2@664.16,2053.84 ccw(c641.93,2076.07) 673.37,2076.07 ; v2@664.16,2053.84 ccw(c641.93,2076.07) 673.37,2076.07 ; v2@664.16,2053.84 ccw(c641.93,2076.07) 673.37,2076.07 ; v2@664.16,2053.84 ccw(c641.93,2076.07) 673.37,2076.07 ; C18.1@664.49,2107.15 cw(c643.05,2085.71) 673.37,2085.71 ; C18.1@664.49,2107.15 cw(c643.05,2085.71) 673.37,2085.71 ; C18.1@664.49,2107.15 cw(c643.05,2085.71) 673.37,2085.71 ; C18.1@664.49,2107.15 cw(c643.05,2085.71) 673.37,2085.71 ; C18.1@664.49,2107.15 cw(c643.05,2085.71) 673.37,2085.71 ; C18.1@664.49,2128.85 ccw(c643.05,2150.29) 673.37,2150.29 ; C18.1@664.49,2128.85 ccw(c643.05,2150.29) 673.37,2150.29 ; C18.1@664.49,2128.85 ccw(c643.05,2150.29) 673.37,2150.29 ; C18.1@664.49,2128.85 ccw(c643.05,2150.29) 673.37,2150.29 ; C18.1@664.49,2128.85 ccw(c643.05,2150.29) 673.37,2150.29 ; C19.1@664.49,2207.15 cw(c643.05,2185.71) 673.37,2185.71 ; C19.1@664.49,2207.15 cw(c643.05,2185.71) 673.37,2185.71 ; C19.1@664.49,2207.15 cw(c643.05,2185.71) 673.37,2185.71 ; C19.1@664.49,2207.15 cw(c643.05,2185.71) 673.37,2185.71 ; C19.1@664.49,2207.15 cw(c643.05,2185.71) 673.37,2185.71 ; v2@666.75,2055.83 ccw(c658.37,2070.34) 674.56,2066 ; v2@666.75,2055.83 ccw(c658.37,2070.34) 674.56,2066 ; v2@666.75,2055.83 ccw(c658.37,2070.34) 674.56,2066 ; v2@666.75,2055.83 ccw(c658.37,2070.34) 674.56,2066 ; v2@666.75,2055.83 ccw(c658.37,2070.34) 674.56,2066 ; v2@666.75,2055.83 ccw(c658.37,2070.34) 674.56,2066 ; v2@666.75,2055.83 ccw(c658.37,2070.34) 674.56,2066 ; v2@666.75,2055.83 ccw(c658.37,2070.34) 674.56,2066 ; v2@666.75,2055.83 ccw(c658.37,2070.34) 674.56,2066 ; v2@666.75,2055.83 ccw(c658.37,2070.34) 674.56,2066 ; v2@666.75,2055.83 ccw(c658.37,2070.34) 674.56,2066 ; v2@666.75,2055.83 ccw(c658.37,2070.34) 674.56,2066 ; v2@666.75,2055.83 ccw(c658.37,2070.34) 674.56,2066 ; v2@666.75,2055.83 ccw(c658.37,2070.34) 674.56,2066 ; v2@666.75,2055.83 ccw(c658.37,2070.34) 674.56,2066 ; 672.58,2064.52 ccw(c686.41,2068.22) v2@679.25,2055.83 ; 672.58,2064.52 ccw(c686.41,2068.22) v2@679.25,2055.83 ; 672.58,2064.52 ccw(c686.41,2068.22) v2@679.25,2055.83 ; 672.58,2064.52 ccw(c686.41,2068.22) v2@679.25,2055.83 ; 672.58,2064.52 ccw(c686.41,2068.22) v2@679.25,2055.83 ; 672.58,2064.52 ccw(c686.41,2068.22) v2@679.25,2055.83 ; 672.58,2064.52 ccw(c686.41,2068.22) v2@679.25,2055.83 ; 672.58,2064.52 ccw(c686.41,2068.22) v2@679.25,2055.83 ; 672.58,2064.52 ccw(c686.41,2068.22) v2@679.25,2055.83 ; 672.58,2064.52 ccw(c686.41,2068.22) v2@679.25,2055.83 ; 672.58,2064.52 ccw(c686.41,2068.22) v2@679.25,2055.83 ; 672.58,2064.52 ccw(c686.41,2068.22) v2@679.25,2055.83 ; 672.58,2064.52 ccw(c686.41,2068.22) v2@679.25,2055.83 ; 672.58,2064.52 ccw(c686.41,2068.22) v2@679.25,2055.83 ; 672.58,2064.52 ccw(c686.41,2068.22) v2@679.25,2055.83 ; v2@673.37,2061.57 cw(c727.83,2061.57) C18.1@689.32,2100.08 ; v2@673.37,2061.57 cw(c727.83,2061.57) C18.1@689.32,2100.08 ; v2@673.37,2061.57 cw(c727.83,2061.57) C18.1@689.32,2100.08 ; v2@673.37,2061.57 cw(c727.83,2061.57) C18.1@689.32,2100.08 ; v2@673.37,2061.57 cw(c727.83,2061.57) C18.1@689.32,2100.08 ; 673.37,2074.28 ccw(c702.28,2074.28) v2@681.84,2053.84 ; 673.37,2074.28 ccw(c702.28,2074.28) v2@681.84,2053.84 ; 673.37,2074.28 ccw(c702.28,2074.28) v2@681.84,2053.84 ; 673.37,2074.28 ccw(c702.28,2074.28) v2@681.84,2053.84 ; 673.37,2074.28 ccw(c702.28,2074.28) v2@681.84,2053.84 ; 673.37,2085.71 cw(c703.69,2085.71) C18.1@682.25,2107.15 ; 673.37,2085.71 cw(c703.69,2085.71) C18.1@682.25,2107.15 ; 673.37,2085.71 cw(c703.69,2085.71) C18.1@682.25,2107.15 ; 673.37,2085.71 cw(c703.69,2085.71) C18.1@682.25,2107.15 ; 673.37,2085.71 cw(c703.69,2085.71) C18.1@682.25,2107.15 ; 673.37,2150.29 ccw(c703.69,2150.29) C18.1@682.25,2128.85 ; 673.37,2150.29 ccw(c703.69,2150.29) C18.1@682.25,2128.85 ; 673.37,2150.29 ccw(c703.69,2150.29) C18.1@682.25,2128.85 ; 673.37,2150.29 ccw(c703.69,2150.29) C18.1@682.25,2128.85 ; 673.37,2150.29 ccw(c703.69,2150.29) C18.1@682.25,2128.85 ; 673.37,2161.57 cw(c727.83,2161.57) C19.1@689.32,2200.08 ; 673.37,2161.57 cw(c727.83,2161.57) C19.1@689.32,2200.08 ; 673.37,2161.57 cw(c727.83,2161.57) C19.1@689.32,2200.08 ; 673.37,2161.57 cw(c727.83,2161.57) C19.1@689.32,2200.08 ; 673.37,2161.57 cw(c727.83,2161.57) C19.1@689.32,2200.08 ; 673.37,2174.43 ccw(c727.83,2174.43) C18.1@689.32,2135.92 ; 673.37,2174.43 ccw(c727.83,2174.43) C18.1@689.32,2135.92 ; 673.37,2174.43 ccw(c727.83,2174.43) C18.1@689.32,2135.92 ; 673.37,2174.43 ccw(c727.83,2174.43) C18.1@689.32,2135.92 ; 673.37,2174.43 ccw(c727.83,2174.43) C18.1@689.32,2135.92 ; 673.37,2185.71 cw(c703.69,2185.71) C19.1@682.25,2207.15 ; 673.37,2185.71 cw(c703.69,2185.71) C19.1@682.25,2207.15 ; 673.37,2185.71 cw(c703.69,2185.71) C19.1@682.25,2207.15 ; 673.37,2185.71 cw(c703.69,2185.71) C19.1@682.25,2207.15 ; 673.37,2185.71 cw(c703.69,2185.71) C19.1@682.25,2207.15 ; 678.9,2082.22 ccw(c716.06,2072.27) v2@683.56,2051.69 ; 678.9,2082.22 ccw(c716.06,2072.27) v2@683.56,2051.69 ; 678.9,2082.22 ccw(c716.06,2072.27) v2@683.56,2051.69 ; 678.9,2082.22 ccw(c716.06,2072.27) v2@683.56,2051.69 ; 678.9,2082.22 ccw(c716.06,2072.27) v2@683.56,2051.69 ; 678.9,2082.22 ccw(c716.06,2072.27) v2@683.56,2051.69 ; 678.9,2082.22 ccw(c716.06,2072.27) v2@683.56,2051.69 ; 678.9,2082.22 ccw(c716.06,2072.27) v2@683.56,2051.69 ; 678.9,2082.22 ccw(c716.06,2072.27) v2@683.56,2051.69 ; 678.9,2082.22 ccw(c716.06,2072.27) v2@683.56,2051.69 ; 678.9,2082.22 ccw(c716.06,2072.27) v2@683.56,2051.69 ; 678.9,2082.22 ccw(c716.06,2072.27) v2@683.56,2051.69 ; 678.9,2082.22 ccw(c716.06,2072.27) v2@683.56,2051.69 ; 678.9,2082.22 ccw(c716.06,2072.27) v2@683.56,2051.69 ; 678.9,2082.22 ccw(c716.06,2072.27) v2@683.56,2051.69
EFFEN_CSB: P6.2 U1.18 | length 2800.1
  Top Layer w10: U1.18@2409.45,1890.16 2737.16,1890.16 3168.68,2321.68 3262.43,2321.68 ; P6.2@3328.35,2362.2 3302.96,2362.2 3262.43,2321.68 ; 3262.43,2321.68 cw(c3307.25,2276.86) P6.2@3322.46,2338.39 ; 3262.43,2321.68 cw(c3307.25,2276.86) P6.2@3322.46,2338.39 ; 3262.43,2321.68 cw(c3307.25,2276.86) P6.2@3322.46,2338.39 ; 3262.43,2321.68 cw(c3307.25,2276.86) P6.2@3322.46,2338.39 ; 3262.43,2321.68 cw(c3307.25,2276.86) P6.2@3322.46,2338.39 ; 3274.96,2334.21 cw(c3312.22,2296.95) P6.2@3324.86,2348.1 ; 3274.96,2334.21 cw(c3312.22,2296.95) P6.2@3324.86,2348.1 ; 3274.96,2334.21 cw(c3312.22,2296.95) P6.2@3324.86,2348.1 ; 3274.96,2334.21 cw(c3312.22,2296.95) P6.2@3324.86,2348.1 ; 3274.96,2334.21 cw(c3312.22,2296.95) P6.2@3324.86,2348.1 ; 3284.83,2337.66 ccw(c3283.51,2405.32) P6.2@3332.29,2358.41 ; 3284.83,2337.66 ccw(c3283.51,2405.32) P6.2@3332.29,2358.41 ; 3284.83,2337.66 ccw(c3283.51,2405.32) P6.2@3332.29,2358.41 ; 3284.83,2337.66 ccw(c3283.51,2405.32) P6.2@3332.29,2358.41 ; 3284.83,2337.66 ccw(c3283.51,2405.32) P6.2@3332.29,2358.41 ; 3284.83,2337.66 ccw(c3283.51,2405.32) P6.2@3332.29,2358.41 ; 3284.83,2337.66 ccw(c3283.51,2405.32) P6.2@3332.29,2358.41 ; 3284.83,2337.66 ccw(c3283.51,2405.32) P6.2@3332.29,2358.41 ; 3284.83,2337.66 ccw(c3283.51,2405.32) P6.2@3332.29,2358.41 ; 3284.83,2337.66 ccw(c3283.51,2405.32) P6.2@3332.29,2358.41 ; 3287.49,2346.74 cw(c3317.18,2317.04) P6.2@3327.26,2357.81 ; 3287.49,2346.74 cw(c3317.18,2317.04) P6.2@3327.26,2357.81 ; 3287.49,2346.74 cw(c3317.18,2317.04) P6.2@3327.26,2357.81 ; 3287.49,2346.74 cw(c3317.18,2317.04) P6.2@3327.26,2357.81 ; 3287.49,2346.74 cw(c3317.18,2317.04) P6.2@3327.26,2357.81 ; 3308.97,2338.13 ccw(c3308.12,2381.66) P6.2@3339.5,2351.48 ; 3308.97,2338.13 ccw(c3308.12,2381.66) P6.2@3339.5,2351.48 ; 3308.97,2338.13 ccw(c3308.12,2381.66) P6.2@3339.5,2351.48 ; 3308.97,2338.13 ccw(c3308.12,2381.66) P6.2@3339.5,2351.48 ; 3308.97,2338.13 ccw(c3308.12,2381.66) P6.2@3339.5,2351.48 ; 3308.97,2338.13 ccw(c3308.12,2381.66) P6.2@3339.5,2351.48 ; 3308.97,2338.13 ccw(c3308.12,2381.66) P6.2@3339.5,2351.48 ; 3308.97,2338.13 ccw(c3308.12,2381.66) P6.2@3339.5,2351.48 ; 3308.97,2338.13 ccw(c3308.12,2381.66) P6.2@3339.5,2351.48 ; 3308.97,2338.13 ccw(c3308.12,2381.66) P6.2@3339.5,2351.48